# EAGLE board GRASS CUTTING ROBOT_Circuit (EAGLE 9.7.0)

Size 242.2 x 226.47 mm. Coordinates in mm from the lower left corner, seen from the top.
Outline: 0,0 242.2,0 242.2,226.47 0,226.47 0,0
Copper layers (1*16): Top 0.035mm / dielectric 1.5mm / Bottom 0.035mm
Design rules "default": minimum track width 6mil, minimum drill 0.35mm, track to track 6mil, track to pad 6mil, pad to pad 6mil, via to via 6mil, smd to smd 6mil, copper to edge 40mil, drill to drill 6mil, minimum pad ring 10mil, minimum via ring 8mil, stop-mask expansion 4mil, vias tented up to drill 0mil, thermal gap 10mil

## Footprints (pad centres in the part's own frame; a part is rotated, then mirrored left to right if it is on the bottom)
HC-SR04 = drill 1.016 long: 1 -3.81,0; 2 -1.27,0; 3 1.27,0; 4 3.81,0
DG01D = drill 1.118 pad 3.15 octagon: + 2.54,0; - -2.54,0
MOTOR = drill 1.118 pad 3.15 octagon: + 2.54,0; - -2.54,0
BATTERY-GENERIC = drill 1.118 pad 3.15 octagon: + 2.54,0; - -2.54,0
SWITCH-SPDT-PTH-8.5X3.7MM = drill 1.016 pad 1.88: 1 -2.54,0; 2 0,0; 3 2.54,0
SG90 = drill 1.016 long: 1 -2.54,0; 2 0,0; 3 2.54,0
ARDUINO-UNO-R3-SHIELD = drill 1.016 pad 1.88: 3.3V 24.13,-2.54; 5V 24.13,0; A0 24.13,12.7; A1 24.13,15.24; A2 24.13,17.78; A3 24.13,20.32; A4 24.13,22.86; A5 24.13,25.4; AREF -24.13,-13.97; D2 -24.13,20.32; D3 -24.13,17.78; D4 -24.13,15.24; D5 -24.13,12.7; D6 -24.13,10.16; D7 -24.13,7.62; D8 -24.13,3.81; D9 -24.13,1.27; D10 -24.13,-1.27; D11 -24.13,-3.81; D12 -24.13,-6.35; D13 -24.13,-8.89; GND@0 24.13,2.54; GND@1 24.13,5.08; GND@2 -24.13,-11.43; IOREF 24.13,-7.62; NC 24.13,-10.16; RES 24.13,-5.08; RX -24.13,25.4; SCL -24.13,-19.05; SDA -24.13,-16.51; TX -24.13,22.86; VIN 24.13,7.62
DIP762W53P254L1969H508Q16B = drill 0.743 pad 1.343: 1 -3.81,8.89; 2 -3.81,6.35; 3 -3.81,3.81; 4 -3.81,1.27; 5 -3.81,-1.27; 6 -3.81,-3.81; 7 -3.81,-6.35; 8 -3.81,-8.89; 9 3.81,-8.89; 10 3.81,-6.35; 11 3.81,-3.81; 12 3.81,-1.27; 13 3.81,1.27; 14 3.81,3.81; 15 3.81,6.35; 16 3.81,8.89

## Placement (x,y rotation side)
DIST1  DISTANCE-SENSOR-4PINHC-SR04  [HC-SR04]  57.43,22.23 0 top
M1  MOTOR_DG01D  [DG01D]  12.7,152.17 180 top
M2  MOTOR_DG01D  [DG01D]  57.58,151.03 180 top
M3  MOTOR_DG01D  [DG01D]  149.82,135.87 180 top
M4  MOTOR_DG01D  [DG01D]  189.86,134.16 180 top
M5  MOTOR_HDR  [MOTOR]  233.94,76.21 0 top
P1  BATTERYGENERIC  [BATTERY-GENERIC]  147.37,30.16 180 top
S1  TOGGLE  [SWITCH-SPDT-PTH-8.5X3.7MM]  87.5,46.29 90 top
SERVO3  SERVOSG90  [SG90]  107.65,143.29 180 top
U1  ARDUINO-UNO-R3-SHIELD  [ARDUINO-UNO-R3-SHIELD]  84.45,79.98 270 top
U3  L293E  [DIP762W53P254L1969H508Q16B]  74.77,119.16 90 top
U4  L293E  [DIP762W53P254L1969H508Q16B]  101.8,118.42 90 top

## Library data of the parts
DIST1 M1-M5 P1 S1 SERVO3 U1 U3 U4 = Tinkercad

## Nets
M1_+: M1.+ U3.14
M1_-: M1.- U3.11
M2_+: M2.+ U3.3
M2_-: M2.- U3.6
M3_+: M3.+ U4.14
M3_-: M3.- U4.11
M4_+: M4.+ U4.3
M4_-: M4.- U4.6
P1+: M5.+ P1.+ S1.2 U3.8 U3.16 U4.8 U4.16
P1-: DIST1.4 M5.- P1.- SERVO3.1 U1.GND@0 U1.GND@1 U1.GND@2 U3.4 U3.5 U3.12 U3.13 U4.4 U4.5 U4.12 U4.13
U1_5V: DIST1.1 SERVO3.2 U1.5V U3.1 U3.9 U4.1 U4.9
U1_A0: DIST1.2 U1.A0
U1_A1: DIST1.3 U1.A1
U1_AREF: S1.3 U1.AREF
U1_D2: U1.D2 U4.7
U1_D3: U1.D3 U4.2
U1_D4: U1.D4 U4.10
U1_D6: U1.D6 U4.15
U1_D8: U1.D8 U3.7
U1_D9: U1.D9 U3.2
U1_D10: SERVO3.3 U1.D10
U1_D11: U1.D11 U3.10
U1_D12: U1.D12 U3.15

## Tracks (layer width: path | path; a pad name or v marks a point on that pad's centre or on a via)
M1_+  (1 unrouted)
M1_-  (1 unrouted)
M2_+  (1 unrouted)
M2_-  (1 unrouted)
M3_+  (1 unrouted)
M3_-  (1 unrouted)
M4_+  (1 unrouted)
M4_-  (1 unrouted)
P1+  (6 unrouted)
P1-  (14 unrouted)
U1_5V  (6 unrouted)
U1_A0  (1 unrouted)
U1_A1  (1 unrouted)
U1_AREF  (1 unrouted)
U1_D2  (1 unrouted)
U1_D3  (1 unrouted)
U1_D4  (1 unrouted)
U1_D6  (1 unrouted)
U1_D8  (1 unrouted)
U1_D9  (1 unrouted)
U1_D10  (1 unrouted)
U1_D11  (1 unrouted)
U1_D12  (1 unrouted)